# Altium PCB Maxi Gamer 3D - Rev 1.1_2023-03-26.pcbdoc
Units mil, origin at the board's own origin, x right, y up, seen from the top; angles counter-clockwise.
Board outline 46422.5 x 38348.5 mil, 2 copper layers (Top Layer, Bottom Layer); 3 components, 0 nets, 347 pads, 156 vias.
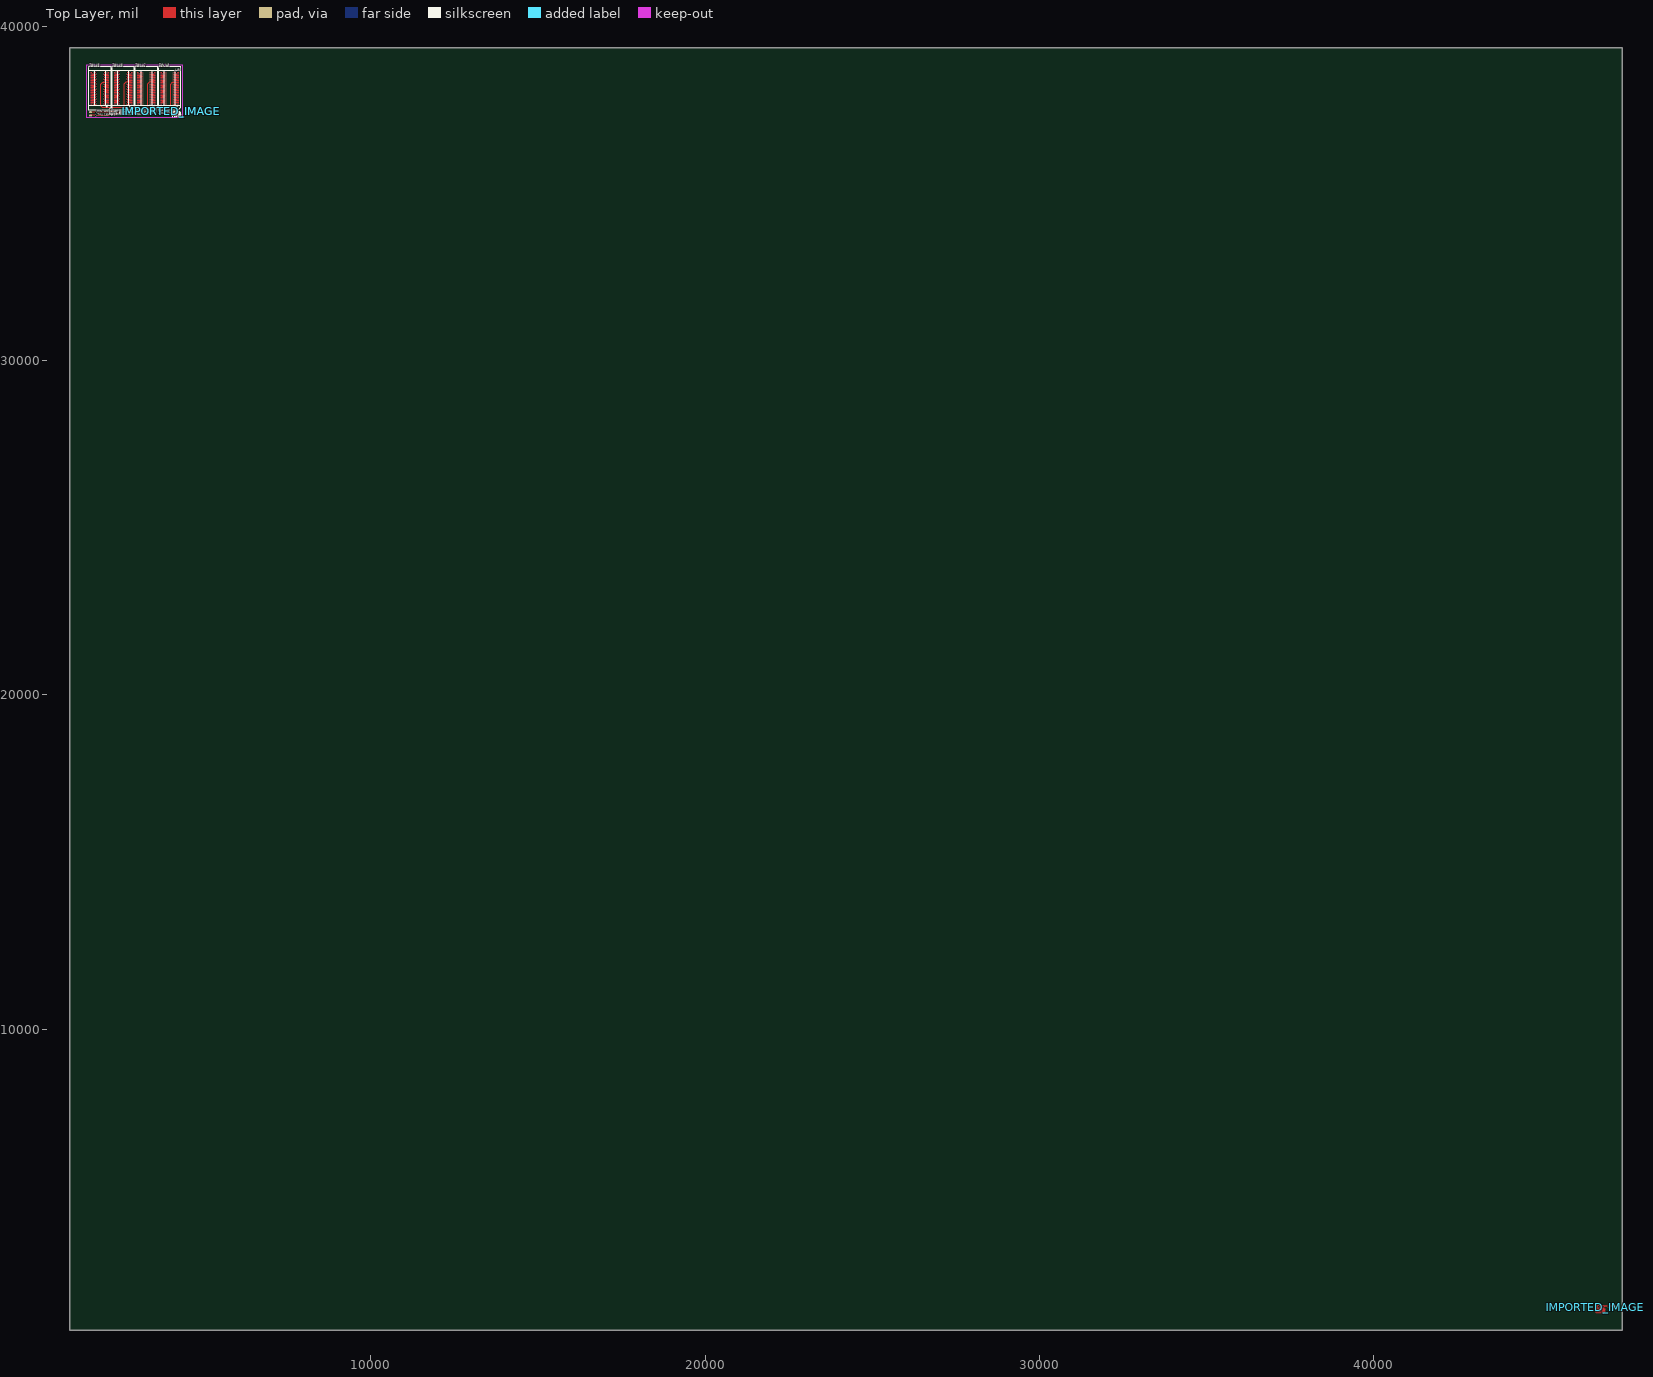
[diagram p0: Top Layer view]
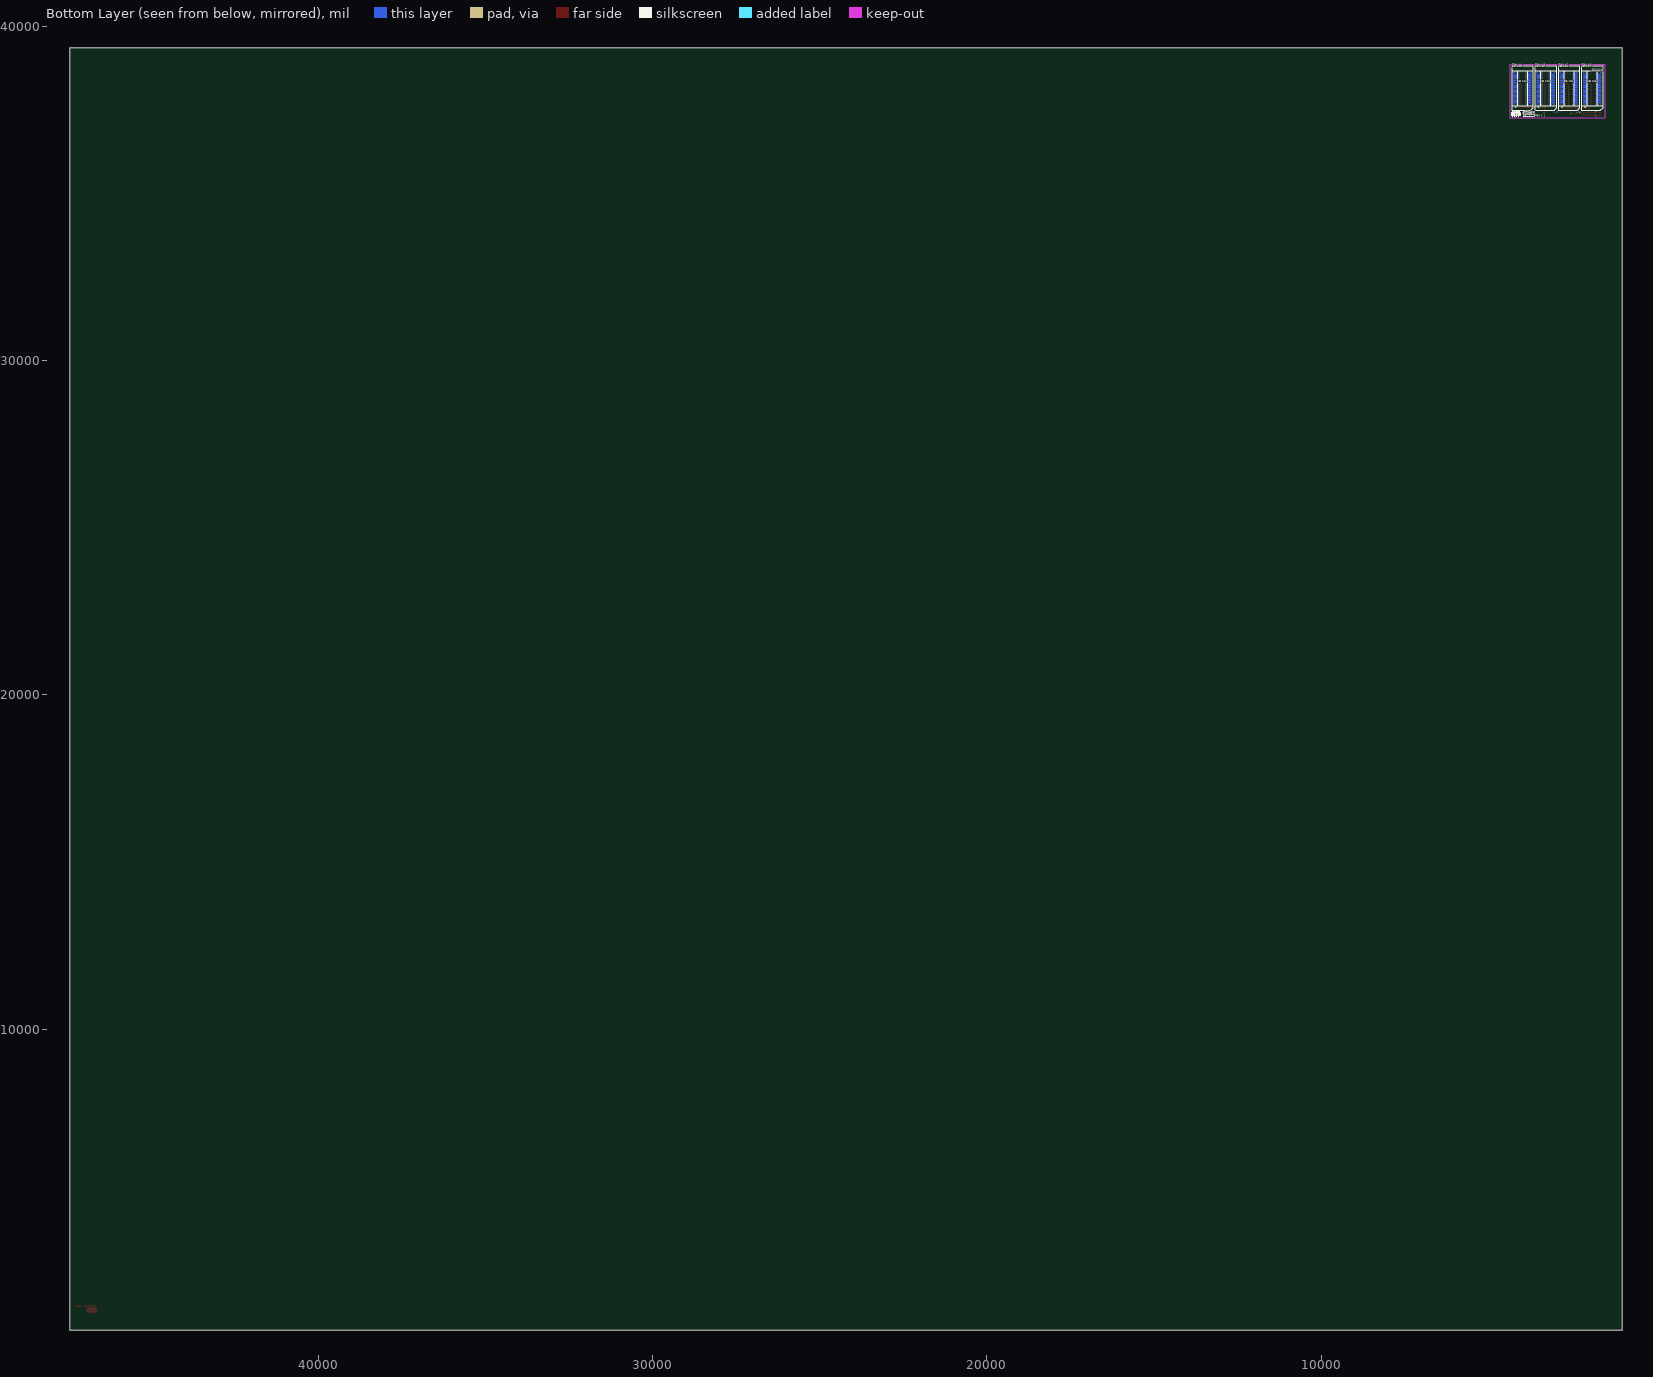
[diagram p1: Bottom Layer view, seen from below]

## Layer stack, top to bottom
Top Layer: signal copper (thickness not stored)
Dielectric: dielectric 12.6, FR-4, Dk 4.8
Bottom Layer: signal copper (thickness not stored)

## Board outline
47422.5,1000 1000,1000 1000,39348.5 47422.5,39348.5

## Components (designator, comment, footprint, x,y, rotation, side; value= is the part's Value field where it differs from the comment)
IMPORTED_IMAGE "IMPORTED_IMAGE" IMPORTED_IMAGE#1 4028.82,37460.16 r0 top
IMPORTED_IMAGE "IMPORTED_IMAGE" IMPORTED_IMAGE#2 46627.5,1677.01 r0 top
IMPORTED_IMAGE "IMPORTED_IMAGE" IMPORTED_IMAGE#1 4026.18,37460.16 r0 top

## Footprints (in the part's own frame and the unit in brackets; to place one, negate y for a bottom-side part, rotate by r counter-clockwise, add the part's x,y. Pads: shape width x height; smd on the part's side, far side on the other; paste and mask are expansions set on the pad)
IMPORTED_IMAGE#1 [mil]
  silkscreen extent 0,-177 295,0
IMPORTED_IMAGE#2 [mil]
  Top Layer region: 281 vertices and 16 holes, not listed, extent 0,-177.01 181.11,0
  Top Layer region: 366 vertices and 10 holes, not listed, extent 185.47,-176.57 295,-1.31

## Free pads (board coordinates)
  round 0 smd: 1(2109.36,37668.5) 1(2805.01,37668.5) 1(3500.01,37668.5) 1(4195.01,37668.5) 2(2109.36,37718.5) 2(2805.01,37718.5) 2(3500.01,37718.5) 2(4195.01,37718.5) 3(2109.36,37768.5) 3(2805.01,37768.5) 3(3500.01,37768.5) 3(4195.01,37768.5) 4(2109.36,37818.5) 4(2805.01,37818.5) 4(3500.01,37818.5) 4(4195.01,37818.5) 5(2109.36,37868.5) 5(2805.01,37868.5) 5(3500.01,37868.5) 5(4195.01,37868.5) 6(2109.36,37918.5) 6(2805.01,37918.5) 6(3500.01,37918.5) 6(4195.01,37918.5) 7(2109.36,37968.5) 7(2805.01,37968.5) 7(3500.01,37968.5) 7(4195.01,37968.5) 8(2109.36,38018.5) 8(2805.01,38018.5) 8(3500.01,38018.5) 8(4195.01,38018.5) 9(2109.36,38068.5) 9(2805.01,38068.5) 9(3500.01,38068.5) 9(4195.01,38068.5) 10(2109.36,38118.5) 10(2805.01,38118.5) 10(3500.01,38118.5) 10(4195.01,38118.5) 11(2109.36,38168.5) 11(2805.01,38168.5) 11(3500.01,38168.5) 11(4195.01,38168.5) 12(2109.36,38218.5) 12(2805.01,38218.5) 12(3500.01,38218.5) 12(4195.01,38218.5) 13(2109.36,38268.5) 13(2805.01,38268.5) 13(3500.01,38268.5) 13(4195.01,38268.5) 14(2109.36,38318.5) 14(2805.01,38318.5) 14(3500.01,38318.5) 14(4195.01,38318.5) 15(2109.36,38368.5) 15(2805.01,38368.5) 15(3500.01,38368.5) 15(4195.01,38368.5) 16(2109.36,38418.5) 16(2805.01,38418.5) 16(3500.01,38418.5) 16(4195.01,38418.5) 17(2109.36,38468.5) 17(2805.01,38468.5) 17(3500.01,38468.5) 17(4195.01,38468.5) 18(2109.36,38518.5) 18(2805.01,38518.5) 18(3500.01,38518.5) 18(4195.01,38518.5) 19(2109.36,38568.5) 19(2805.01,38568.5) 19(3500.01,38568.5) 19(4195.01,38568.5) 20(2109.36,38618.5) 20(2805.01,38618.5) 20(3500.01,38618.5) 20(4195.01,38618.5) 21(1679.99,38618.5) 21(2375.64,38618.5) 21(2375.64,38618.5) 21(3070.64,38618.5) 21(3765.64,38618.5) 22(1679.99,38568.5) 22(2375.64,38568.5) 22(3070.64,38568.5) 22(3765.64,38568.5) 23(1679.99,38518.5) 23(2375.64,38518.5) 23(3070.64,38518.5) 23(3765.64,38518.5) 24(1679.99,38468.5) 24(2375.64,38468.5) 24(3070.64,38468.5) 24(3765.64,38468.5) 25(1679.99,38418.5) 25(2375.64,38418.5) 25(3070.64,38418.5) 25(3765.64,38418.5) 26(1679.99,38368.5) 26(2375.64,38368.5) 26(3070.64,38368.5) 26(3765.64,38368.5) 27(1679.99,38318.5) 27(2375.64,38318.5) 27(3070.64,38318.5) 27(3765.64,38318.5) 28(1679.99,38268.5) 28(2375.64,38268.5) 28(3070.64,38268.5) 28(3765.64,38268.5) 29(1679.99,38218.5) 29(2375.64,38218.5) 29(3070.64,38218.5) 29(3765.64,38218.5) 30(1679.99,38168.5) 30(2375.64,38168.5) 30(3070.64,38168.5) 30(3765.64,38168.5) 31(1679.99,38118.5) 31(2375.64,38118.5) 31(3070.64,38118.5) 31(3765.64,38118.5) 32(1679.99,38068.5) 32(2375.64,38068.5) 32(3070.64,38068.5) 32(3765.64,38068.5) 33(1679.99,38018.5) 33(2375.64,38018.5) 33(3070.64,38018.5) 33(3765.64,38018.5) 34(1679.99,37968.5) 34(2375.64,37968.5) 34(3070.64,37968.5) 34(3765.64,37968.5) 35(1679.99,37918.5) 35(2375.64,37918.5) 35(3070.64,37918.5) 35(3765.64,37918.5) 36(1679.99,37868.5) 36(2375.64,37868.5) 36(3070.64,37868.5) 36(3765.64,37868.5) 37(1679.99,37818.5) 37(2375.64,37818.5) 37(3070.64,37818.5) 37(3765.64,37818.5) 38(1679.99,37768.5) 38(2375.64,37768.5) 38(3070.64,37768.5) 38(3765.64,37768.5) 39(1679.99,37718.5) 39(2375.64,37718.5) 39(3070.64,37718.5) 39(3765.64,37718.5) 40(1679.99,37668.5) 40(2375.64,37668.5) 40(3070.64,37668.5) 40(3765.64,37668.5)
  round 0 smd far side: 1(2109.36,37668.5) 1(2805.01,37668.5) 1(3500.01,37668.5) 1(4195.01,37668.5) 2(2109.36,37718.5) 2(2805.01,37718.5) 2(3500.01,37718.5) 2(4195.01,37718.5) 3(2109.36,37768.5) 3(2805.01,37768.5) 3(3500.01,37768.5) 3(4195.01,37768.5) 4(2109.36,37818.5) 4(2805.01,37818.5) 4(3500.01,37818.5) 4(4195.01,37818.5) 5(2109.36,37868.5) 5(2805.01,37868.5) 5(3500.01,37868.5) 5(4195.01,37868.5) 6(2109.36,37918.5) 6(2805.01,37918.5) 6(3500.01,37918.5) 6(4195.01,37918.5) 7(2109.36,37968.5) 7(2805.01,37968.5) 7(3500.01,37968.5) 7(4195.01,37968.5) 8(2109.36,38018.5) 8(2805.01,38018.5) 8(3500.01,38018.5) 8(4195.01,38018.5) 9(2109.36,38068.5) 9(2805.01,38068.5) 9(3500.01,38068.5) 9(4195.01,38068.5) 10(2109.36,38118.5) 10(2805.01,38118.5) 10(3500.01,38118.5) 10(4195.01,38118.5) 11(2109.36,38168.5) 11(2805.01,38168.5) 11(3500.01,38168.5) 11(4195.01,38168.5) 12(2109.36,38218.5) 12(2805.01,38218.5) 12(3500.01,38218.5) 12(4195.01,38218.5) 13(2109.36,38268.5) 13(2805.01,38268.5) 13(3500.01,38268.5) 13(4195.01,38268.5) 14(2109.36,38318.5) 14(2805.01,38318.5) 14(3500.01,38318.5) 14(4195.01,38318.5) 15(2109.36,38368.5) 15(2805.01,38368.5) 15(3500.01,38368.5) 15(4195.01,38368.5) 16(2109.36,38418.5) 16(2805.01,38418.5) 16(3500.01,38418.5) 16(4195.01,38418.5) 17(2109.36,38468.5) 17(2805.01,38468.5) 17(3500.01,38468.5) 17(4195.01,38468.5) 18(2109.36,38518.5) 18(2805.01,38518.5) 18(3500.01,38518.5) 18(4195.01,38518.5) 19(2109.36,38568.5) 19(2805.01,38568.5) 19(3500.01,38568.5) 19(4195.01,38568.5) 20(2109.36,38618.5) 20(2805.01,38618.5) 20(3500.01,38618.5) 20(4195.01,38618.5) 21(1679.99,38618.5) 21(2375.64,38618.5) 21(3070.64,38618.5) 21(3765.64,38618.5) 22(1679.99,38568.5) 22(2375.64,38568.5) 22(3070.64,38568.5) 22(3765.64,38568.5) 23(1679.99,38518.5) 23(2375.64,38518.5) 23(3070.64,38518.5) 23(3765.64,38518.5) 24(1679.99,38468.5) 24(2375.64,38468.5) 24(3070.64,38468.5) 24(3765.64,38468.5) 25(1679.99,38418.5) 25(2375.64,38418.5) 25(3070.64,38418.5) 25(3765.64,38418.5) 26(1679.99,38368.5) 26(2375.64,38368.5) 26(3070.64,38368.5) 26(3765.64,38368.5) 27(1679.99,38318.5) 27(2375.64,38318.5) 27(3070.64,38318.5) 27(3765.64,38318.5) 28(1679.99,38268.5) 28(2375.64,38268.5) 28(3070.64,38268.5) 28(3765.64,38268.5) 29(1679.99,38218.5) 29(2375.64,38218.5) 29(3070.64,38218.5) 29(3765.64,38218.5) 30(1679.99,38168.5) 30(2375.64,38168.5) 30(3070.64,38168.5) 30(3765.64,38168.5) 31(1679.99,38118.5) 31(2375.64,38118.5) 31(3070.64,38118.5) 31(3765.64,38118.5) 32(1679.99,38068.5) 32(2375.64,38068.5) 32(3070.64,38068.5) 32(3765.64,38068.5) 33(1679.99,38018.5) 33(2375.64,38018.5) 33(3070.64,38018.5) 33(3765.64,38018.5) 34(1679.99,37968.5) 34(2375.64,37968.5) 34(3070.64,37968.5) 34(3765.64,37968.5) 35(1679.99,37918.5) 35(2375.64,37918.5) 35(3070.64,37918.5) 35(3765.64,37918.5) 36(1679.99,37868.5) 36(2375.64,37868.5) 36(3070.64,37868.5) 36(3765.64,37868.5) 37(1679.99,37818.5) 37(2375.64,37818.5) 37(3070.64,37818.5) 37(3765.64,37818.5) 38(1679.99,37768.5) 38(2375.64,37768.5) 38(3070.64,37768.5) 38(3765.64,37768.5) 39(1679.99,37718.5) 39(2375.64,37718.5) 39(3070.64,37718.5) 39(3765.64,37718.5) 40(1679.99,37668.5) 40(2375.64,37668.5) 40(3070.64,37668.5) 40(3765.64,37668.5)
  oval 98.42x59.05 smd: ""(1615,37328.5) ""(1615,37428.5)
  round 39.37 hole 24 slot 24.2 at 90 deg: ""(1685,37668.5) ""(1685,38618.5) ""(2105,37668.5) ""(2105,38618.5) ""(2380,37668.5) ""(2380,38618.5) ""(2530,37398.5) ""(2800,37668.5) ""(2800,38618.5) ""(2875,37398.5) ""(2995,37398.5) ""(3075,37668.5) ""(3075,38618.5) ""(3340,37398.5) ""(3495,37668.5) ""(3495,38618.5) ""(3770,37668.5) ""(3770,38618.5) ""(4190,37668.5) ""(4190,38618.5)
  round 59.05 hole 35.43 slot 37.4 at 0 deg: ""(1775,37328.5) ""(1775,37428.5)
  round 59.05 hole 35.43 slot 37.4 at 90 deg: ""(2240,37398.5) ""(2340,37398.5)

## Via types
v1: diameter 24, hole 12, Top Layer to Bottom Layer, tented both sides, 156 vias

## Nets (pads, with @x,y where several pads share a name; then routed paths per layer and width w, separated by ;. In a path a pad name is that pad's centre, name@x,y a point inside that pad or via, vN(x,y) a via of type N, cw(c..) or ccw(c..) an arc to the next point about the centre after c; other vN are vias at no path point)
copper on no net: | length 42119.1
  Top Layer w10: 1615,37328.5 1775,37328.5 2170,37328.5 2240,37398.5 ; 1615,37428.5 1775,37428.5 2160,37428.5 2190,37458.5 2280,37458.5 2340,37398.5 2530,37398.5 ; 1680,37668.5 v1(1790,37668.5) ; 1680,37718.5 v1(1790,37718.5) ; 1680,37768.5 v1(1790,37768.5) ; 1680,37818.5 v1(1790,37818.5) ; 1680,37868.5 v1(1790,37868.5) ; 1680,37918.5 v1(1790,37918.5) ; 1680,37968.5 v1(1790,37968.5) ; 1680,38018.5 v1(1790,38018.5) ; 1680,38068.5 v1(1790,38068.5) ; 1680,38118.5 v1(1790,38118.5) ; 1680,38168.5 v1(1790,38168.5) ; 1680,38218.5 v1(1790,38218.5) ; 1680,38268.5 v1(1790,38268.5) ; 1680,38318.5 v1(1790,38318.5) ; 1680,38368.5 v1(1790,38368.5) ; 1680,38418.5 v1(1790,38418.5) ; 1680,38468.5 v1(1790,38468.5) ; 1680,38518.5 v1(1790,38518.5) ; 1680,38568.5 v1(1790,38568.5) ; 1680,38618.5 v1(1790,38618.5) ; v1(2000,37668.5) 2109.36,37668.5 ; v1(2000,37718.5) 2109.36,37718.5 ; v1(2000,37768.5) 2109.36,37768.5 ; v1(2000,37818.5) 2109.36,37818.5 ; v1(2000,37868.5) 2109.36,37868.5 ; v1(2000,37918.5) 2109.36,37918.5 ; v1(2000,37968.5) 2109.36,37968.5 ; v1(2000,38018.5) 2109.36,38018.5 ; v1(2000,38068.5) 2109.36,38068.5 ; v1(2000,38118.5) 2109.36,38118.5 ; v1(2000,38168.5) 2109.36,38168.5 ; v1(2000,38218.5) 2109.36,38218.5 ; v1(2000,38268.5) 2109.36,38268.5 ; v1(2000,38368.5) 2109.36,38368.5 ; v1(2000,38418.5) 2109.36,38418.5 ; v1(2000,38468.5) 2109.36,38468.5 ; v1(2000,38518.5) 2109.36,38518.5 ; v1(2000,38568.5) 2109.36,38568.5 ; v1(2000,38618.5) 2109.36,38618.5 ; 2109.36,38318.5 1975,38318.5 1925,38268.5 1925,37613.5 1975,37563.5 2615,37563.5 ; 2375.64,37668.5 v1(2485,37668.5) ; 2375.64,37718.5 v1(2485,37718.5) ; 2375.64,37768.5 v1(2485,37768.5) ; 2375.64,37818.5 v1(2485,37818.5) ; 2375.64,37868.5 v1(2485,37868.5) ; 2375.64,37918.5 v1(2485,37918.5) ; 2375.64,37968.5 v1(2485,37968.5) ; 2375.64,38018.5 v1(2485,38018.5) ; 2375.64,38068.5 v1(2485,38068.5) ; 2375.64,38118.5 v1(2485,38118.5) ; 2375.64,38168.5 v1(2485,38168.5) ; 2375.64,38218.5 v1(2485,38218.5) ; 2375.64,38268.5 v1(2485,38268.5) ; 2375.64,38318.5 v1(2485,38318.5) ; 2375.64,38368.5 v1(2485,38368.5) ; 2375.64,38418.5 v1(2485,38418.5) ; 2375.64,38468.5 v1(2485,38468.5) ; 2375.64,38518.5 v1(2485,38518.5) ; 2375.64,38568.5 v1(2485,38568.5) ; 2375.64,38618.5 v1(2485,38618.5) ; v1(2695,37668.5) 2805,37668.5 ; v1(2695,37718.5) 2805,37718.5 ; v1(2695,37768.5) 2805,37768.5 ; v1(2695,37818.5) 2805,37818.5 ; v1(2695,37868.5) 2805,37868.5 ; v1(2695,37918.5) 2805,37918.5 ; v1(2695,37968.5) 2805,37968.5 ; v1(2695,38018.5) 2805,38018.5 ; v1(2695,38068.5) 2805,38068.5 ; v1(2695,38118.5) 2805,38118.5 ; v1(2695,38168.5) 2805,38168.5 ; v1(2695,38218.5) 2805,38218.5 ; v1(2695,38268.5) 2805,38268.5 ; v1(2695,38368.5) 2805,38368.5 ; v1(2695,38418.5) 2805,38418.5 ; v1(2695,38468.5) 2805,38468.5 ; v1(2695,38518.5) 2805,38518.5 ; v1(2695,38568.5) 2805,38568.5 ; v1(2695,38618.5) 2805,38618.5 ; 2805,38318.5 2665,38318.5 2615,38268.5 2615,37563.5 ; 2875,37398.5 2710,37563.5 2615,37563.5 ; 3070.64,37668.5 v1(3180,37668.5) ; 3070.64,37718.5 v1(3180,37718.5) ; 3070.64,37768.5 v1(3180,37768.5) ; 3070.64,37818.5 v1(3180,37818.5) ; 3070.64,37868.5 v1(3180,37868.5) ; 3070.64,37918.5 v1(3180,37918.5) ; 3070.64,37968.5 v1(3180,37968.5) ; 3070.64,38018.5 v1(3180,38018.5) ; 3070.64,38068.5 v1(3180,38068.5) ; 3070.64,38118.5 v1(3180,38118.5) ; 3070.64,38168.5 v1(3180,38168.5) ; 3070.64,38218.5 v1(3180,38218.5) ; 3070.64,38268.5 v1(3180,38268.5) ; 3070.64,38318.5 v1(3180,38318.5) ; 3070.64,38368.5 v1(3180,38368.5) ; 3070.64,38418.5 v1(3180,38418.5) ; 3070.64,38468.5 v1(3180,38468.5) ; 3070.64,38518.5 v1(3180,38518.5) ; 3070.64,38568.5 v1(3180,38568.5) ; 3070.64,38618.5 v1(3180,38618.5) ; 3340,37398.5 3310,37428.5 3310,37563.5 ; v1(3390,37668.5) 3500,37668.5 ; v1(3390,37718.5) 3500,37718.5 ; v1(3390,37768.5) 3500,37768.5 ; v1(3390,37818.5) 3500,37818.5 ; v1(3390,37868.5) 3500,37868.5 ; v1(3390,37918.5) 3500,37918.5 ; v1(3390,37968.5) 3500,37968.5 ; v1(3390,38018.5) 3500,38018.5 ; v1(3390,38068.5) 3500,38068.5 ; v1(3390,38118.5) 3500,38118.5 ; v1(3390,38168.5) 3500,38168.5 ; v1(3390,38218.5) 3500,38218.5 ; v1(3390,38268.5) 3500,38268.5 ; v1(3390,38368.5) 3500,38368.5 ; v1(3390,38418.5) 3500,38418.5 ; v1(3390,38468.5) 3500,38468.5 ; v1(3390,38518.5) 3500,38518.5 ; v1(3390,38568.5) 3500,38568.5 ; v1(3390,38618.5) 3500,38618.5 ; 3500,38318.5 3365,38318.5 3310,38263.5 3310,37563.5 ; 3765.64,37668.5 v1(3875,37668.5) ; 3765.64,37718.5 v1(3875,37718.5) ; 3765.64,37768.5 v1(3875,37768.5) ; 3765.64,37818.5 v1(3875,37818.5) ; 3765.64,37868.5 v1(3875,37868.5) ; 3765.64,37918.5 v1(3875,37918.5) ; 3765.64,37968.5 v1(3875,37968.5) ; 3765.64,38018.5 v1(3875,38018.5) ; 3765.64,38068.5 v1(3875,38068.5) ; 3765.64,38118.5 v1(3875,38118.5) ; 3765.64,38168.5 v1(3875,38168.5) ; 3765.64,38218.5 v1(3875,38218.5) ; 3765.64,38268.5 v1(3875,38268.5) ; 3765.64,38318.5 v1(3875,38318.5) ; 3765.64,38368.5 v1(3875,38368.5) ; 3765.64,38418.5 v1(3875,38418.5) ; 3765.64,38468.5 v1(3875,38468.5) ; 3765.64,38518.5 v1(3875,38518.5) ; 3765.64,38568.5 v1(3875,38568.5) ; 3765.64,38618.5 v1(3875,38618.5) ; v1(4085,37668.5) 4195,37668.5 ; v1(4085,37718.5) 4195,37718.5 ; v1(4085,37768.5) 4195,37768.5 ; v1(4085,37818.5) 4195,37818.5 ; v1(4085,37868.5) 4195,37868.5 ; v1(4085,37918.5) 4195,37918.5 ; v1(4085,37968.5) 4195,37968.5 ; v1(4085,38018.5) 4195,38018.5 ; v1(4085,38068.5) 4195,38068.5 ; v1(4085,38118.5) 4195,38118.5 ; v1(4085,38168.5) 4195,38168.5 ; v1(4085,38218.5) 4195,38218.5 ; v1(4085,38268.5) 4195,38268.5 ; v1(4085,38368.5) 4195,38368.5 ; v1(4085,38418.5) 4195,38418.5 ; v1(4085,38468.5) 4195,38468.5 ; v1(4085,38518.5) 4195,38518.5 ; v1(4085,38568.5) 4195,38568.5 ; v1(4085,38618.5) 4195,38618.5 ; 4195,38318.5 4060,38318.5 4010,38263.5 4010,37613.5 3960,37563.5 3310,37563.5
  Bottom Layer w10: 1680,37668.5 v1(1790,37668.5) ; 1680,37718.5 v1(1790,37718.5) ; 1680,37768.5 v1(1790,37768.5) ; 1680,37818.5 v1(1790,37818.5) ; 1680,37868.5 v1(1790,37868.5) ; 1680,37918.5 v1(1790,37918.5) ; 1680,37968.5 v1(1790,37968.5) ; 1680,38018.5 v1(1790,38018.5) ; 1680,38068.5 v1(1790,38068.5) ; 1680,38118.5 v1(1790,38118.5) ; 1680,38168.5 v1(1790,38168.5) ; 1680,38218.5 v1(1790,38218.5) ; 1680,38268.5 v1(1790,38268.5) ; 1680,38318.5 v1(1790,38318.5) ; 1680,38368.5 v1(1790,38368.5) ; 1680,38418.5 v1(1790,38418.5) ; 1680,38468.5 v1(1790,38468.5) ; 1680,38518.5 v1(1790,38518.5) ; 1680,38568.5 v1(1790,38568.5) ; 1680,38618.5 v1(1790,38618.5) ; v1(2000,37668.5) 2109.36,37668.5 ; v1(2000,37718.5) 2109.36,37718.5 ; v1(2000,37768.5) 2109.36,37768.5 ; v1(2000,37818.5) 2109.36,37818.5 ; v1(2000,37868.5) 2109.36,37868.5 ; v1(2000,37918.5) 2109.36,37918.5 ; v1(2000,37968.5) 2109.36,37968.5 ; v1(2000,38018.5) 2109.36,38018.5 ; v1(2000,38068.5) 2109.36,38068.5 ; v1(2000,38118.5) 2109.36,38118.5 ; v1(2000,38168.5) 2109.36,38168.5 ; v1(2000,38218.5) 2109.36,38218.5 ; v1(2000,38268.5) 2109.36,38268.5 ; v1(2000,38368.5) 2109.36,38368.5 ; v1(2000,38418.5) 2109.36,38418.5 ; v1(2000,38468.5) 2109.36,38468.5 ; v1(2000,38518.5) 2109.36,38518.5 ; v1(2000,38568.5) 2109.36,38568.5 ; v1(2000,38618.5) 2109.36,38618.5 ; 2240,37398.5 2305,37463.5 2930,37463.5 2995,37398.5 ; 2375.64,37668.5 v1(2485,37668.5) ; 2375.64,37718.5 v1(2485,37718.5) ; 2375.64,37768.5 v1(2485,37768.5) ; 2375.64,37818.5 v1(2485,37818.5) ; 2375.64,37868.5 v1(2485,37868.5) ; 2375.64,37918.5 v1(2485,37918.5) ; 2375.64,37968.5 v1(2485,37968.5) ; 2375.64,38018.5 v1(2485,38018.5) ; 2375.64,38068.5 v1(2485,38068.5) ; 2375.64,38118.5 v1(2485,38118.5) ; 2375.64,38168.5 v1(2485,38168.5) ; 2375.64,38218.5 v1(2485,38218.5) ; 2375.64,38268.5 v1(2485,38268.5) ; 2375.64,38318.5 v1(2485,38318.5) ; 2375.64,38368.5 v1(2485,38368.5) ; 2375.64,38418.5 v1(2485,38418.5) ; 2375.64,38468.5 v1(2485,38468.5) ; 2375.64,38518.5 v1(2485,38518.5) ; 2375.64,38568.5 v1(2485,38568.5) ; 2375.64,38618.5 v1(2485,38618.5) ; v1(2695,37668.5) 2805,37668.5 ; v1(2695,37718.5) 2805,37718.5 ; v1(2695,37768.5) 2805,37768.5 ; v1(2695,37818.5) 2805,37818.5 ; v1(2695,37868.5) 2805,37868.5 ; v1(2695,37918.5) 2805,37918.5 ; v1(2695,37968.5) 2805,37968.5 ; v1(2695,38018.5) 2805,38018.5 ; v1(2695,38068.5) 2805,38068.5 ; v1(2695,38118.5) 2805,38118.5 ; v1(2695,38168.5) 2805,38168.5 ; v1(2695,38218.5) 2805,38218.5 ; v1(2695,38268.5) 2805,38268.5 ; v1(2695,38368.5) 2805,38368.5 ; v1(2695,38418.5) 2805,38418.5 ; v1(2695,38468.5) 2805,38468.5 ; v1(2695,38518.5) 2805,38518.5 ; v1(2695,38568.5) 2805,38568.5 ; v1(2695,38618.5) 2805,38618.5 ; 3070.64,37668.5 v1(3180,37668.5) ; 3070.64,37718.5 v1(3180,37718.5) ; 3070.64,37768.5 v1(3180,37768.5) ; 3070.64,37818.5 v1(3180,37818.5) ; 3070.64,37868.5 v1(3180,37868.5) ; 3070.64,37918.5 v1(3180,37918.5) ; 3070.64,37968.5 v1(3180,37968.5) ; 3070.64,38018.5 v1(3180,38018.5) ; 3070.64,38068.5 v1(3180,38068.5) ; 3070.64,38118.5 v1(3180,38118.5) ; 3070.64,38168.5 v1(3180,38168.5) ; 3070.64,38218.5 v1(3180,38218.5) ; 3070.64,38268.5 v1(3180,38268.5) ; 3070.64,38318.5 v1(3180,38318.5) ; 3070.64,38368.5 v1(3180,38368.5) ; 3070.64,38418.5 v1(3180,38418.5) ; 3070.64,38468.5 v1(3180,38468.5) ; 3070.64,38518.5 v1(3180,38518.5) ; 3070.64,38568.5 v1(3180,38568.5) ; 3070.64,38618.5 v1(3180,38618.5) ; v1(3390,37668.5) 3500,37668.5 ; v1(3390,37718.5) 3500,37718.5 ; v1(3390,37768.5) 3500,37768.5 ; v1(3390,37818.5) 3500,37818.5 ; v1(3390,37868.5) 3500,37868.5 ; v1(3390,37918.5) 3500,37918.5 ; v1(3390,37968.5) 3500,37968.5 ; v1(3390,38018.5) 3500,38018.5 ; v1(3390,38068.5) 3500,38068.5 ; v1(3390,38118.5) 3500,38118.5 ; v1(3390,38168.5) 3500,38168.5 ; v1(3390,38218.5) 3500,38218.5 ; v1(3390,38268.5) 3500,38268.5 ; v1(3390,38368.5) 3500,38368.5 ; v1(3390,38418.5) 3500,38418.5 ; v1(3390,38468.5) 3500,38468.5 ; v1(3390,38518.5) 3500,38518.5 ; v1(3390,38568.5) 3500,38568.5 ; v1(3390,38618.5) 3500,38618.5 ; 3765.64,37668.5 v1(3875,37668.5) ; 3765.64,37718.5 v1(3875,37718.5) ; 3765.64,37768.5 v1(3875,37768.5) ; 3765.64,37818.5 v1(3875,37818.5) ; 3765.64,37868.5 v1(3875,37868.5) ; 3765.64,37918.5 v1(3875,37918.5) ; 3765.64,37968.5 v1(3875,37968.5) ; 3765.64,38018.5 v1(3875,38018.5) ; 3765.64,38068.5 v1(3875,38068.5) ; 3765.64,38118.5 v1(3875,38118.5) ; 3765.64,38168.5 v1(3875,38168.5) ; 3765.64,38218.5 v1(3875,38218.5) ; 3765.64,38268.5 v1(3875,38268.5) ; 3765.64,38318.5 v1(3875,38318.5) ; 3765.64,38368.5 v1(3875,38368.5) ; 3765.64,38418.5 v1(3875,38418.5) ; 3765.64,38468.5 v1(3875,38468.5) ; 3765.64,38518.5 v1(3875,38518.5) ; 3765.64,38568.5 v1(3875,38568.5) ; 3765.64,38618.5 v1(3875,38618.5) ; v1(4085,37668.5) 4195,37668.5 ; v1(4085,37718.5) 4195,37718.5 ; v1(4085,37768.5) 4195,37768.5 ; v1(4085,37818.5) 4195,37818.5 ; v1(4085,37868.5) 4195,37868.5 ; v1(4085,37918.5) 4195,37918.5 ; v1(4085,37968.5) 4195,37968.5 ; v1(4085,38018.5) 4195,38018.5 ; v1(4085,38068.5) 4195,38068.5 ; v1(4085,38118.5) 4195,38118.5 ; v1(4085,38168.5) 4195,38168.5 ; v1(4085,38218.5) 4195,38218.5 ; v1(4085,38268.5) 4195,38268.5 ; v1(4085,38368.5) 4195,38368.5 ; v1(4085,38418.5) 4195,38418.5 ; v1(4085,38468.5) 4195,38468.5 ; v1(4085,38518.5) 4195,38518.5 ; v1(4085,38568.5) 4195,38568.5 ; v1(4085,38618.5) 4195,38618.5

## Other copper
Top Layer:
  region: 2054.68,38308.5 2054.68,38328.5 2164.05,38328.5 2164.05,38308.5
  region: 2750.32,38308.5 2750.32,38328.5 2859.69,38328.5 2859.69,38308.5
  region: 3445.32,38308.5 3445.32,38328.5 3554.69,38328.5 3554.69,38308.5
  region: 4140.32,38308.5 4140.32,38328.5 4249.69,38328.5 4249.69,38308.5
  region: 1625.31,38608.5 1625.31,38628.5 1734.68,38628.5 1734.68,38608.5
  region: 1625.31,38558.5 1625.31,38578.5 1734.68,38578.5 1734.68,38558.5
  region: 1625.31,38508.5 1625.31,38528.5 1734.68,38528.5 1734.68,38508.5
  region: 1625.31,38458.5 1625.31,38478.5 1734.68,38478.5 1734.68,38458.5
  region: 1625.31,38408.5 1625.31,38428.5 1734.68,38428.5 1734.68,38408.5
  region: 1625.31,38358.5 1625.31,38378.5 1734.68,38378.5 1734.68,38358.5
  region: 1625.31,38308.5 1625.31,38328.5 1734.68,38328.5 1734.68,38308.5
  region: 1625.31,38258.5 1625.31,38278.5 1734.68,38278.5 1734.68,38258.5
  region: 1625.31,38208.5 1625.31,38228.5 1734.68,38228.5 1734.68,38208.5
  region: 1625.31,38158.5 1625.31,38178.5 1734.68,38178.5 1734.68,38158.5
  region: 1625.31,38108.5 1625.31,38128.5 1734.68,38128.5 1734.68,38108.5
  region: 1625.31,38058.5 1625.31,38078.5 1734.68,38078.5 1734.68,38058.5
  region: 1625.31,38008.5 1625.31,38028.5 1734.68,38028.5 1734.68,38008.5
  region: 1625.31,37958.5 1625.31,37978.5 1734.68,37978.5 1734.68,37958.5
  region: 1625.31,37908.5 1625.31,37928.5 1734.68,37928.5 1734.68,37908.5
  region: 1625.31,37858.5 1625.31,37878.5 1734.68,37878.5 1734.68,37858.5
  region: 1625.31,37808.5 1625.31,37828.5 1734.68,37828.5 1734.68,37808.5
  region: 1625.31,37758.5 1625.31,37778.5 1734.68,37778.5 1734.68,37758.5
  region: 1625.31,37708.5 1625.31,37728.5 1734.68,37728.5 1734.68,37708.5
  region: 1625.31,37658.5 1625.31,37678.5 1734.68,37678.5 1734.68,37658.5
  region: 2054.68,38608.5 2054.68,38628.5 2164.05,38628.5 2164.05,38608.5
  region: 2054.68,38558.5 2054.68,38578.5 2164.05,38578.5 2164.05,38558.5
  region: 2054.68,38508.5 2054.68,38528.5 2164.05,38528.5 2164.05,38508.5
  region: 2054.68,38458.5 2054.68,38478.5 2164.05,38478.5 2164.05,38458.5
  region: 2054.68,38408.5 2054.68,38428.5 2164.05,38428.5 2164.05,38408.5
  region: 2054.68,38358.5 2054.68,38378.5 2164.05,38378.5 2164.05,38358.5
  region: 2054.68,38258.5 2054.68,38278.5 2164.05,38278.5 2164.05,38258.5
  region: 2054.68,38208.5 2054.68,38228.5 2164.05,38228.5 2164.05,38208.5
  region: 2054.68,38158.5 2054.68,38178.5 2164.05,38178.5 2164.05,38158.5
  region: 2054.68,38108.5 2054.68,38128.5 2164.05,38128.5 2164.05,38108.5
  region: 2054.68,38058.5 2054.68,38078.5 2164.05,38078.5 2164.05,38058.5
  region: 2054.68,38008.5 2054.68,38028.5 2164.05,38028.5 2164.05,38008.5
  region: 2054.68,37958.5 2054.68,37978.5 2164.05,37978.5 2164.05,37958.5
  region: 2054.68,37908.5 2054.68,37928.5 2164.05,37928.5 2164.05,37908.5
  region: 2054.68,37858.5 2054.68,37878.5 2164.05,37878.5 2164.05,37858.5
  region: 2054.68,37808.5 2054.68,37828.5 2164.05,37828.5 2164.05,37808.5
  region: 2054.68,37758.5 2054.68,37778.5 2164.05,37778.5 2164.05,37758.5
  region: 2054.68,37708.5 2054.68,37728.5 2164.05,37728.5 2164.05,37708.5
  region: 2054.68,37658.5 2054.68,37678.5 2164.05,37678.5 2164.05,37658.5
  region: 2320.95,38608.5 2320.95,38628.5 2430.32,38628.5 2430.32,38608.5
  region: 2320.95,38608.5 2320.95,38628.5 2430.32,38628.5 2430.32,38608.5
  region: 2320.95,38558.5 2320.95,38578.5 2430.32,38578.5 2430.32,38558.5
  region: 2320.95,38508.5 2320.95,38528.5 2430.32,38528.5 2430.32,38508.5
  region: 2320.95,38458.5 2320.95,38478.5 2430.32,38478.5 2430.32,38458.5
  region: 2320.95,37658.5 2320.95,37678.5 2430.32,37678.5 2430.32,37658.5
  region: 2320.95,37708.5 2320.95,37728.5 2430.32,37728.5 2430.32,37708.5
  region: 2320.95,37758.5 2320.95,37778.5 2430.32,37778.5 2430.32,37758.5
  region: 2320.95,37808.5 2320.95,37828.5 2430.32,37828.5 2430.32,37808.5
  region: 2320.95,37858.5 2320.95,37878.5 2430.32,37878.5 2430.32,37858.5
  region: 2320.95,37908.5 2320.95,37928.5 2430.32,37928.5 2430.32,37908.5
  region: 2320.95,37958.5 2320.95,37978.5 2430.32,37978.5 2430.32,37958.5
  region: 2320.95,38008.5 2320.95,38028.5 2430.32,38028.5 2430.32,38008.5
  region: 2320.95,38058.5 2320.95,38078.5 2430.32,38078.5 2430.32,38058.5
  region: 2320.95,38108.5 2320.95,38128.5 2430.32,38128.5 2430.32,38108.5
  region: 2320.95,38158.5 2320.95,38178.5 2430.32,38178.5 2430.32,38158.5
  region: 2320.95,38208.5 2320.95,38228.5 2430.32,38228.5 2430.32,38208.5
  region: 2320.95,38258.5 2320.95,38278.5 2430.32,38278.5 2430.32,38258.5
  region: 2320.95,38308.5 2320.95,38328.5 2430.32,38328.5 2430.32,38308.5
  region: 2320.95,38358.5 2320.95,38378.5 2430.32,38378.5 2430.32,38358.5
  region: 2320.95,38408.5 2320.95,38428.5 2430.32,38428.5 2430.32,38408.5
  region: 2750.32,38608.5 2750.32,38628.5 2859.69,38628.5 2859.69,38608.5
  region: 2750.32,38558.5 2750.32,38578.5 2859.69,38578.5 2859.69,38558.5
  region: 2750.32,38508.5 2750.32,38528.5 2859.69,38528.5 2859.69,38508.5
  region: 2750.32,38458.5 2750.32,38478.5 2859.69,38478.5 2859.69,38458.5
  region: 2750.32,38408.5 2750.32,38428.5 2859.69,38428.5 2859.69,38408.5
  region: 2750.32,38358.5 2750.32,38378.5 2859.69,38378.5 2859.69,38358.5
  region: 2750.32,38258.5 2750.32,38278.5 2859.69,38278.5 2859.69,38258.5
  region: 2750.32,38208.5 2750.32,38228.5 2859.69,38228.5 2859.69,38208.5
  region: 2750.32,38158.5 2750.32,38178.5 2859.69,38178.5 2859.69,38158.5
  region: 2750.32,38108.5 2750.32,38128.5 2859.69,38128.5 2859.69,38108.5
  region: 2750.32,38058.5 2750.32,38078.5 2859.69,38078.5 2859.69,38058.5
  region: 2750.32,38008.5 2750.32,38028.5 2859.69,38028.5 2859.69,38008.5
  region: 2750.32,37958.5 2750.32,37978.5 2859.69,37978.5 2859.69,37958.5
  region: 2750.32,37908.5 2750.32,37928.5 2859.69,37928.5 2859.69,37908.5
  region: 2750.32,37858.5 2750.32,37878.5 2859.69,37878.5 2859.69,37858.5
  region: 2750.32,37808.5 2750.32,37828.5 2859.69,37828.5 2859.69,37808.5
  region: 2750.32,37758.5 2750.32,37778.5 2859.69,37778.5 2859.69,37758.5
  region: 2750.32,37708.5 2750.32,37728.5 2859.69,37728.5 2859.69,37708.5
  region: 2750.32,37658.5 2750.32,37678.5 2859.69,37678.5 2859.69,37658.5
  region: 3015.95,38608.5 3015.95,38628.5 3125.32,38628.5 3125.32,38608.5
  region: 3015.95,38558.5 3015.95,38578.5 3125.32,38578.5 3125.32,38558.5
  region: 3015.95,38508.5 3015.95,38528.5 3125.32,38528.5 3125.32,38508.5
  region: 3015.95,38458.5 3015.95,38478.5 3125.32,38478.5 3125.32,38458.5
  region: 3015.95,38408.5 3015.95,38428.5 3125.32,38428.5 3125.32,38408.5
  region: 3015.95,38358.5 3015.95,38378.5 3125.32,38378.5 3125.32,38358.5
  region: 3015.95,38308.5 3015.95,38328.5 3125.32,38328.5 3125.32,38308.5
  region: 3015.95,38258.5 3015.95,38278.5 3125.32,38278.5 3125.32,38258.5
  region: 3015.95,38208.5 3015.95,38228.5 3125.32,38228.5 3125.32,38208.5
  region: 3015.95,38158.5 3015.95,38178.5 3125.32,38178.5 3125.32,38158.5
  region: 3015.95,38108.5 3015.95,38128.5 3125.32,38128.5 3125.32,38108.5
  region: 3015.95,38058.5 3015.95,38078.5 3125.32,38078.5 3125.32,38058.5
  region: 3015.95,38008.5 3015.95,38028.5 3125.32,38028.5 3125.32,38008.5
  region: 3015.95,37958.5 3015.95,37978.5 3125.32,37978.5 3125.32,37958.5
  region: 3015.95,37908.5 3015.95,37928.5 3125.32,37928.5 3125.32,37908.5
  region: 3015.95,37858.5 3015.95,37878.5 3125.32,37878.5 3125.32,37858.5
  region: 3015.95,37808.5 3015.95,37828.5 3125.32,37828.5 3125.32,37808.5
  region: 3015.95,37758.5 3015.95,37778.5 3125.32,37778.5 3125.32,37758.5
  region: 3015.95,37708.5 3015.95,37728.5 3125.32,37728.5 3125.32,37708.5
  region: 3015.95,37658.5 3015.95,37678.5 3125.32,37678.5 3125.32,37658.5
  region: 3445.32,38608.5 3445.32,38628.5 3554.69,38628.5 3554.69,38608.5
  region: 3445.32,38558.5 3445.32,38578.5 3554.69,38578.5 3554.69,38558.5
  region: 3445.32,38508.5 3445.32,38528.5 3554.69,38528.5 3554.69,38508.5
  region: 3445.32,38458.5 3445.32,38478.5 3554.69,38478.5 3554.69,38458.5
  region: 3445.32,38408.5 3445.32,38428.5 3554.69,38428.5 3554.69,38408.5
  region: 3445.32,38358.5 3445.32,38378.5 3554.69,38378.5 3554.69,38358.5
  region: 3445.32,38258.5 3445.32,38278.5 3554.69,38278.5 3554.69,38258.5
  region: 3445.32,38208.5 3445.32,38228.5 3554.69,38228.5 3554.69,38208.5
  region: 3445.32,38158.5 3445.32,38178.5 3554.69,38178.5 3554.69,38158.5
  region: 3445.32,38108.5 3445.32,38128.5 3554.69,38128.5 3554.69,38108.5
  region: 3445.32,38058.5 3445.32,38078.5 3554.69,38078.5 3554.69,38058.5
  region: 3445.32,38008.5 3445.32,38028.5 3554.69,38028.5 3554.69,38008.5
  region: 3445.32,37958.5 3445.32,37978.5 3554.69,37978.5 3554.69,37958.5
  region: 3445.32,37908.5 3445.32,37928.5 3554.69,37928.5 3554.69,37908.5
  region: 3445.32,37858.5 3445.32,37878.5 3554.69,37878.5 3554.69,37858.5
  region: 3445.32,37808.5 3445.32,37828.5 3554.69,37828.5 3554.69,37808.5
  region: 3445.32,37758.5 3445.32,37778.5 3554.69,37778.5 3554.69,37758.5
  region: 3445.32,37708.5 3445.32,37728.5 3554.69,37728.5 3554.69,37708.5
  region: 3445.32,37658.5 3445.32,37678.5 3554.69,37678.5 3554.69,37658.5
  region: 3710.95,37658.5 3710.95,37678.5 3820.32,37678.5 3820.32,37658.5
  region: 3710.95,37708.5 3710.95,37728.5 3820.32,37728.5 3820.32,37708.5
  region: 3710.95,37758.5 3710.95,37778.5 3820.32,37778.5 3820.32,37758.5
  region: 3710.95,37808.5 3710.95,37828.5 3820.32,37828.5 3820.32,37808.5
  region: 3710.95,37858.5 3710.95,37878.5 3820.32,37878.5 3820.32,37858.5
  region: 3710.95,37908.5 3710.95,37928.5 3820.32,37928.5 3820.32,37908.5
  region: 3710.95,37958.5 3710.95,37978.5 3820.32,37978.5 3820.32,37958.5
  region: 3710.95,38008.5 3710.95,38028.5 3820.32,38028.5 3820.32,38008.5
  region: 3710.95,38058.5 3710.95,38078.5 3820.32,38078.5 3820.32,38058.5
  region: 3710.95,38108.5 3710.95,38128.5 3820.32,38128.5 3820.32,38108.5
  region: 3710.95,38158.5 3710.95,38178.5 3820.32,38178.5 3820.32,38158.5
  region: 3710.95,38208.5 3710.95,38228.5 3820.32,38228.5 3820.32,38208.5
  region: 3710.95,38258.5 3710.95,38278.5 3820.32,38278.5 3820.32,38258.5
  region: 3710.95,38308.5 3710.95,38328.5 3820.32,38328.5 3820.32,38308.5
  region: 3710.95,38358.5 3710.95,38378.5 3820.32,38378.5 3820.32,38358.5
  region: 3710.95,38408.5 3710.95,38428.5 3820.32,38428.5 3820.32,38408.5
  region: 3710.95,38458.5 3710.95,38478.5 3820.32,38478.5 3820.32,38458.5
  region: 3710.95,38508.5 3710.95,38528.5 3820.32,38528.5 3820.32,38508.5
  region: 3710.95,38558.5 3710.95,38578.5 3820.32,38578.5 3820.32,38558.5
  region: 3710.95,38608.5 3710.95,38628.5 3820.32,38628.5 3820.32,38608.5
  region: 4140.32,38608.5 4140.32,38628.5 4249.69,38628.5 4249.69,38608.5
  region: 4140.32,38558.5 4140.32,38578.5 4249.69,38578.5 4249.69,38558.5
  region: 4140.32,38508.5 4140.32,38528.5 4249.69,38528.5 4249.69,38508.5
  region: 4140.32,38458.5 4140.32,38478.5 4249.69,38478.5 4249.69,38458.5
  region: 4140.32,38408.5 4140.32,38428.5 4249.69,38428.5 4249.69,38408.5
  region: 4140.32,38358.5 4140.32,38378.5 4249.69,38378.5 4249.69,38358.5
  region: 4140.32,38258.5 4140.32,38278.5 4249.69,38278.5 4249.69,38258.5
  region: 4140.32,38208.5 4140.32,38228.5 4249.69,38228.5 4249.69,38208.5
  region: 4140.32,38158.5 4140.32,38178.5 4249.69,38178.5 4249.69,38158.5
  region: 4140.32,38108.5 4140.32,38128.5 4249.69,38128.5 4249.69,38108.5
  region: 4140.32,38058.5 4140.32,38078.5 4249.69,38078.5 4249.69,38058.5
  region: 4140.32,38008.5 4140.32,38028.5 4249.69,38028.5 4249.69,38008.5
  region: 4140.32,37958.5 4140.32,37978.5 4249.69,37978.5 4249.69,37958.5
  region: 4140.32,37908.5 4140.32,37928.5 4249.69,37928.5 4249.69,37908.5
  region: 4140.32,37858.5 4140.32,37878.5 4249.69,37878.5 4249.69,37858.5
  region: 4140.32,37808.5 4140.32,37828.5 4249.69,37828.5 4249.69,37808.5
  region: 4140.32,37758.5 4140.32,37778.5 4249.69,37778.5 4249.69,37758.5
  region: 4140.32,37708.5 4140.32,37728.5 4249.69,37728.5 4249.69,37708.5
  region: 4140.32,37658.5 4140.32,37678.5 4249.69,37678.5 4249.69,37658.5
Bottom Layer:
  region: 2054.68,38308.5 2054.68,38328.5 2164.05,38328.5 2164.05,38308.5
  region: 2750.32,38308.5 2750.32,38328.5 2859.69,38328.5 2859.69,38308.5
  region: 3445.32,38308.5 3445.32,38328.5 3554.69,38328.5 3554.69,38308.5
  region: 4140.32,38308.5 4140.32,38328.5 4249.69,38328.5 4249.69,38308.5
  region: 1625.31,38608.5 1625.31,38628.5 1734.68,38628.5 1734.68,38608.5
  region: 1625.31,38558.5 1625.31,38578.5 1734.68,38578.5 1734.68,38558.5
  region: 1625.31,38508.5 1625.31,38528.5 1734.68,38528.5 1734.68,38508.5
  region: 1625.31,38458.5 1625.31,38478.5 1734.68,38478.5 1734.68,38458.5
  region: 1625.31,38408.5 1625.31,38428.5 1734.68,38428.5 1734.68,38408.5
  region: 1625.31,38358.5 1625.31,38378.5 1734.68,38378.5 1734.68,38358.5
  region: 1625.31,38308.5 1625.31,38328.5 1734.68,38328.5 1734.68,38308.5
  region: 1625.31,38258.5 1625.31,38278.5 1734.68,38278.5 1734.68,38258.5
  region: 1625.31,38208.5 1625.31,38228.5 1734.68,38228.5 1734.68,38208.5
  region: 1625.31,38158.5 1625.31,38178.5 1734.68,38178.5 1734.68,38158.5
  region: 1625.31,38108.5 1625.31,38128.5 1734.68,38128.5 1734.68,38108.5
  region: 1625.31,38058.5 1625.31,38078.5 1734.68,38078.5 1734.68,38058.5
  region: 1625.31,38008.5 1625.31,38028.5 1734.68,38028.5 1734.68,38008.5
  region: 1625.31,37958.5 1625.31,37978.5 1734.68,37978.5 1734.68,37958.5
  region: 1625.31,37908.5 1625.31,37928.5 1734.68,37928.5 1734.68,37908.5
  region: 1625.31,37858.5 1625.31,37878.5 1734.68,37878.5 1734.68,37858.5
  region: 1625.31,37808.5 1625.31,37828.5 1734.68,37828.5 1734.68,37808.5
  region: 1625.31,37758.5 1625.31,37778.5 1734.68,37778.5 1734.68,37758.5
  region: 1625.31,37708.5 1625.31,37728.5 1734.68,37728.5 1734.68,37708.5
  region: 1625.31,37658.5 1625.31,37678.5 1734.68,37678.5 1734.68,37658.5
  region: 2054.68,38608.5 2054.68,38628.5 2164.05,38628.5 2164.05,38608.5
  region: 2054.68,38558.5 2054.68,38578.5 2164.05,38578.5 2164.05,38558.5
  region: 2054.68,38508.5 2054.68,38528.5 2164.05,38528.5 2164.05,38508.5
  region: 2054.68,38458.5 2054.68,38478.5 2164.05,38478.5 2164.05,38458.5
  region: 2054.68,38408.5 2054.68,38428.5 2164.05,38428.5 2164.05,38408.5
  region: 2054.68,38358.5 2054.68,38378.5 2164.05,38378.5 2164.05,38358.5
  region: 2054.68,38258.5 2054.68,38278.5 2164.05,38278.5 2164.05,38258.5
  region: 2054.68,38208.5 2054.68,38228.5 2164.05,38228.5 2164.05,38208.5
  region: 2054.68,38158.5 2054.68,38178.5 2164.05,38178.5 2164.05,38158.5
  region: 2054.68,38108.5 2054.68,38128.5 2164.05,38128.5 2164.05,38108.5
  region: 2054.68,38058.5 2054.68,38078.5 2164.05,38078.5 2164.05,38058.5
  region: 2054.68,38008.5 2054.68,38028.5 2164.05,38028.5 2164.05,38008.5
  region: 2054.68,37958.5 2054.68,37978.5 2164.05,37978.5 2164.05,37958.5
  region: 2054.68,37908.5 2054.68,37928.5 2164.05,37928.5 2164.05,37908.5
  region: 2054.68,37858.5 2054.68,37878.5 2164.05,37878.5 2164.05,37858.5
  region: 2054.68,37808.5 2054.68,37828.5 2164.05,37828.5 2164.05,37808.5
  region: 2054.68,37758.5 2054.68,37778.5 2164.05,37778.5 2164.05,37758.5
  region: 2054.68,37708.5 2054.68,37728.5 2164.05,37728.5 2164.05,37708.5
  region: 2054.68,37658.5 2054.68,37678.5 2164.05,37678.5 2164.05,37658.5
  region: 2320.95,38558.5 2320.95,38578.5 2430.32,38578.5 2430.32,38558.5
  region: 2320.95,38508.5 2320.95,38528.5 2430.32,38528.5 2430.32,38508.5
  region: 2320.95,38458.5 2320.95,38478.5 2430.32,38478.5 2430.32,38458.5
  region: 2750.32,37658.5 2750.32,37678.5 2859.69,37678.5 2859.69,37658.5
  region: 2750.32,37708.5 2750.32,37728.5 2859.69,37728.5 2859.69,37708.5
  region: 2750.32,37758.5 2750.32,37778.5 2859.69,37778.5 2859.69,37758.5
  region: 2750.32,37808.5 2750.32,37828.5 2859.69,37828.5 2859.69,37808.5
  region: 2750.32,37858.5 2750.32,37878.5 2859.69,37878.5 2859.69,37858.5
  region: 2750.32,37908.5 2750.32,37928.5 2859.69,37928.5 2859.69,37908.5
  region: 2750.32,37958.5 2750.32,37978.5 2859.69,37978.5 2859.69,37958.5
  region: 2750.32,38008.5 2750.32,38028.5 2859.69,38028.5 2859.69,38008.5
  region: 2750.32,38058.5 2750.32,38078.5 2859.69,38078.5 2859.69,38058.5
  region: 2750.32,38108.5 2750.32,38128.5 2859.69,38128.5 2859.69,38108.5
  region: 2750.32,38158.5 2750.32,38178.5 2859.69,38178.5 2859.69,38158.5
  region: 2750.32,38208.5 2750.32,38228.5 2859.69,38228.5 2859.69,38208.5
  region: 2750.32,38258.5 2750.32,38278.5 2859.69,38278.5 2859.69,38258.5
  region: 2750.32,38358.5 2750.32,38378.5 2859.69,38378.5 2859.69,38358.5
  region: 2750.32,38408.5 2750.32,38428.5 2859.69,38428.5 2859.69,38408.5
  region: 2750.32,38458.5 2750.32,38478.5 2859.69,38478.5 2859.69,38458.5
  region: 2750.32,38508.5 2750.32,38528.5 2859.69,38528.5 2859.69,38508.5
  region: 2750.32,38558.5 2750.32,38578.5 2859.69,38578.5 2859.69,38558.5
  region: 2750.32,38608.5 2750.32,38628.5 2859.69,38628.5 2859.69,38608.5
  region: 2320.95,38608.5 2320.95,38628.5 2430.32,38628.5 2430.32,38608.5
  region: 2320.95,38408.5 2320.95,38428.5 2430.32,38428.5 2430.32,38408.5
  region: 2320.95,38358.5 2320.95,38378.5 2430.32,38378.5 2430.32,38358.5
  region: 2320.95,38308.5 2320.95,38328.5 2430.32,38328.5 2430.32,38308.5
  region: 2320.95,38258.5 2320.95,38278.5 2430.32,38278.5 2430.32,38258.5
  region: 2320.95,38208.5 2320.95,38228.5 2430.32,38228.5 2430.32,38208.5
  region: 2320.95,38158.5 2320.95,38178.5 2430.32,38178.5 2430.32,38158.5
  region: 2320.95,38108.5 2320.95,38128.5 2430.32,38128.5 2430.32,38108.5
  region: 2320.95,38058.5 2320.95,38078.5 2430.32,38078.5 2430.32,38058.5
  region: 2320.95,38008.5 2320.95,38028.5 2430.32,38028.5 2430.32,38008.5
  region: 2320.95,37958.5 2320.95,37978.5 2430.32,37978.5 2430.32,37958.5
  region: 2320.95,37908.5 2320.95,37928.5 2430.32,37928.5 2430.32,37908.5
  region: 2320.95,37858.5 2320.95,37878.5 2430.32,37878.5 2430.32,37858.5
  region: 2320.95,37808.5 2320.95,37828.5 2430.32,37828.5 2430.32,37808.5
  region: 2320.95,37758.5 2320.95,37778.5 2430.32,37778.5 2430.32,37758.5
  region: 2320.95,37708.5 2320.95,37728.5 2430.32,37728.5 2430.32,37708.5
  region: 2320.95,37658.5 2320.95,37678.5 2430.32,37678.5 2430.32,37658.5
  region: 3015.95,38608.5 3015.95,38628.5 3125.32,38628.5 3125.32,38608.5
  region: 3015.95,38558.5 3015.95,38578.5 3125.32,38578.5 3125.32,38558.5
  region: 3015.95,38508.5 3015.95,38528.5 3125.32,38528.5 3125.32,38508.5
  region: 3015.95,38458.5 3015.95,38478.5 3125.32,38478.5 3125.32,38458.5
  region: 3015.95,38408.5 3015.95,38428.5 3125.32,38428.5 3125.32,38408.5
  region: 3015.95,38358.5 3015.95,38378.5 3125.32,38378.5 3125.32,38358.5
  region: 3015.95,38308.5 3015.95,38328.5 3125.32,38328.5 3125.32,38308.5
  region: 3015.95,38258.5 3015.95,38278.5 3125.32,38278.5 3125.32,38258.5
  region: 3015.95,38208.5 3015.95,38228.5 3125.32,38228.5 3125.32,38208.5
  region: 3015.95,38158.5 3015.95,38178.5 3125.32,38178.5 3125.32,38158.5
  region: 3015.95,38108.5 3015.95,38128.5 3125.32,38128.5 3125.32,38108.5
  region: 3015.95,38058.5 3015.95,38078.5 3125.32,38078.5 3125.32,38058.5
  region: 3015.95,38008.5 3015.95,38028.5 3125.32,38028.5 3125.32,38008.5
  region: 3015.95,37958.5 3015.95,37978.5 3125.32,37978.5 3125.32,37958.5
  region: 3015.95,37908.5 3015.95,37928.5 3125.32,37928.5 3125.32,37908.5
  region: 3015.95,37858.5 3015.95,37878.5 3125.32,37878.5 3125.32,37858.5
  region: 3015.95,37808.5 3015.95,37828.5 3125.32,37828.5 3125.32,37808.5
  region: 3015.95,37758.5 3015.95,37778.5 3125.32,37778.5 3125.32,37758.5
  region: 3015.95,37708.5 3015.95,37728.5 3125.32,37728.5 3125.32,37708.5
  region: 3015.95,37658.5 3015.95,37678.5 3125.32,37678.5 3125.32,37658.5
  region: 3445.32,38358.5 3445.32,38378.5 3554.69,38378.5 3554.69,38358.5
  region: 3445.32,38408.5 3445.32,38428.5 3554.69,38428.5 3554.69,38408.5
  region: 3445.32,38458.5 3445.32,38478.5 3554.69,38478.5 3554.69,38458.5
  region: 3445.32,38508.5 3445.32,38528.5 3554.69,38528.5 3554.69,38508.5
  region: 3445.32,38558.5 3445.32,38578.5 3554.69,38578.5 3554.69,38558.5
  region: 3445.32,38608.5 3445.32,38628.5 3554.69,38628.5 3554.69,38608.5
  region: 3445.32,38258.5 3445.32,38278.5 3554.69,38278.5 3554.69,38258.5
  region: 3445.32,38208.5 3445.32,38228.5 3554.69,38228.5 3554.69,38208.5
  region: 3445.32,38158.5 3445.32,38178.5 3554.69,38178.5 3554.69,38158.5
  region: 3445.32,38108.5 3445.32,38128.5 3554.69,38128.5 3554.69,38108.5
  region: 3445.32,38058.5 3445.32,38078.5 3554.69,38078.5 3554.69,38058.5
  region: 3445.32,38008.5 3445.32,38028.5 3554.69,38028.5 3554.69,38008.5
  region: 3445.32,37958.5 3445.32,37978.5 3554.69,37978.5 3554.69,37958.5
  region: 3445.32,37908.5 3445.32,37928.5 3554.69,37928.5 3554.69,37908.5
  region: 3445.32,37858.5 3445.32,37878.5 3554.69,37878.5 3554.69,37858.5
  region: 3445.32,37808.5 3445.32,37828.5 3554.69,37828.5 3554.69,37808.5
  region: 3445.32,37758.5 3445.32,37778.5 3554.69,37778.5 3554.69,37758.5
  region: 3445.32,37708.5 3445.32,37728.5 3554.69,37728.5 3554.69,37708.5
  region: 3445.32,37658.5 3445.32,37678.5 3554.69,37678.5 3554.69,37658.5
  region: 3710.95,38608.5 3710.95,38628.5 3820.32,38628.5 3820.32,38608.5
  region: 3710.95,38558.5 3710.95,38578.5 3820.32,38578.5 3820.32,38558.5
  region: 3710.95,38508.5 3710.95,38528.5 3820.32,38528.5 3820.32,38508.5
  region: 3710.95,38458.5 3710.95,38478.5 3820.32,38478.5 3820.32,38458.5
  region: 3710.95,38408.5 3710.95,38428.5 3820.32,38428.5 3820.32,38408.5
  region: 3710.95,38358.5 3710.95,38378.5 3820.32,38378.5 3820.32,38358.5
  region: 3710.95,38308.5 3710.95,38328.5 3820.32,38328.5 3820.32,38308.5
  region: 3710.95,38258.5 3710.95,38278.5 3820.32,38278.5 3820.32,38258.5
  region: 3710.95,38208.5 3710.95,38228.5 3820.32,38228.5 3820.32,38208.5
  region: 3710.95,38158.5 3710.95,38178.5 3820.32,38178.5 3820.32,38158.5
  region: 3710.95,38108.5 3710.95,38128.5 3820.32,38128.5 3820.32,38108.5
  region: 3710.95,38058.5 3710.95,38078.5 3820.32,38078.5 3820.32,38058.5
  region: 3710.95,38008.5 3710.95,38028.5 3820.32,38028.5 3820.32,38008.5
  region: 3710.95,37958.5 3710.95,37978.5 3820.32,37978.5 3820.32,37958.5
  region: 3710.95,37908.5 3710.95,37928.5 3820.32,37928.5 3820.32,37908.5
  region: 3710.95,37858.5 3710.95,37878.5 3820.32,37878.5 3820.32,37858.5
  region: 3710.95,37808.5 3710.95,37828.5 3820.32,37828.5 3820.32,37808.5
  region: 3710.95,37758.5 3710.95,37778.5 3820.32,37778.5 3820.32,37758.5
  region: 3710.95,37708.5 3710.95,37728.5 3820.32,37728.5 3820.32,37708.5
  region: 3710.95,37658.5 3710.95,37678.5 3820.32,37678.5 3820.32,37658.5
  region: 4140.32,38358.5 4140.32,38378.5 4249.69,38378.5 4249.69,38358.5
  region: 4140.32,38408.5 4140.32,38428.5 4249.69,38428.5 4249.69,38408.5
  region: 4140.32,38458.5 4140.32,38478.5 4249.69,38478.5 4249.69,38458.5
  region: 4140.32,38508.5 4140.32,38528.5 4249.69,38528.5 4249.69,38508.5
  region: 4140.32,38558.5 4140.32,38578.5 4249.69,38578.5 4249.69,38558.5
  region: 4140.32,38608.5 4140.32,38628.5 4249.69,38628.5 4249.69,38608.5
  region: 4140.32,38258.5 4140.32,38278.5 4249.69,38278.5 4249.69,38258.5
  region: 4140.32,38208.5 4140.32,38228.5 4249.69,38228.5 4249.69,38208.5
  region: 4140.32,38158.5 4140.32,38178.5 4249.69,38178.5 4249.69,38158.5
  region: 4140.32,38108.5 4140.32,38128.5 4249.69,38128.5 4249.69,38108.5
  region: 4140.32,38058.5 4140.32,38078.5 4249.69,38078.5 4249.69,38058.5
  region: 4140.32,38008.5 4140.32,38028.5 4249.69,38028.5 4249.69,38008.5
  region: 4140.32,37958.5 4140.32,37978.5 4249.69,37978.5 4249.69,37958.5
  region: 4140.32,37908.5 4140.32,37928.5 4249.69,37928.5 4249.69,37908.5
  region: 4140.32,37858.5 4140.32,37878.5 4249.69,37878.5 4249.69,37858.5
  region: 4140.32,37808.5 4140.32,37828.5 4249.69,37828.5 4249.69,37808.5
  region: 4140.32,37758.5 4140.32,37778.5 4249.69,37778.5 4249.69,37758.5
  region: 4140.32,37708.5 4140.32,37728.5 4249.69,37728.5 4249.69,37708.5
  region: 4140.32,37658.5 4140.32,37678.5 4249.69,37678.5 4249.69,37658.5

## Silkscreen, mask and mechanical layers (free items; w line width, h text height)
Top Overlay:
  lines w5.91: 1564.68,37623.5 2219.68,37623.5 ; 1564.68,38663.5 2219.68,38663.5 ; 1739.68,37623.5 1739.68,37638.5 1739.68,38648.5 1739.68,38663.5 ; 2049.68,37623.5 2049.68,37638.5 2049.68,38648.5 2049.68,38663.5 ; 2260.32,37623.5 2915.32,37623.5 ; 2260.32,38663.5 2915.32,38663.5 ; 2435.32,37623.5 2435.32,37638.5 2435.32,38648.5 2435.32,38663.5 ; 2745.32,37623.5 2745.32,37638.5 2745.32,38648.5 2745.32,38663.5 ; 2955.32,37623.5 3610.32,37623.5 ; 2955.32,38663.5 3610.32,38663.5 ; 3130.32,37623.5 3130.32,37638.5 3130.32,38648.5 3130.32,38663.5 ; 3440.32,37623.5 3440.32,37638.5 3440.32,38648.5 3440.32,38663.5 ; 3650.32,37623.5 4305.32,37623.5 ; 3650.32,38663.5 4305.32,38663.5 ; 3825.32,37623.5 3825.32,37638.5 3825.32,38648.5 3825.32,38663.5 ; 4135.32,37623.5 4135.32,37638.5 4135.32,38648.5 4135.32,38663.5 ; 1564.68,37483.5 2139.68,37483.5 2219.68,37563.5 2219.68,38803.5 1564.68,38803.5 1564.68,37483.5 ; 2084.36,37588.5 2104.36,37608.5 2124.36,37588.5 2104.36,37568.5 2084.36,37588.5 ; 2260.32,37483.5 2835.32,37483.5 2915.32,37563.5 2915.32,38803.5 2260.32,38803.5 2260.32,37483.5 ; 2780,37588.5 2800,37608.5 2820,37588.5 2800,37568.5 2780,37588.5 ; 2955.32,37483.5 3530.32,37483.5 3610.32,37563.5 3610.32,38803.5 2955.32,38803.5 2955.32,37483.5 ; 3475,37588.5 3495,37608.5 3515,37588.5 3495,37568.5 3475,37588.5 ; 3650.32,37483.5 4225.32,37483.5 4305.32,37563.5 4305.32,38803.5 3650.32,38803.5 3650.32,37483.5 ; 4170,37588.5 4190,37608.5 4210,37588.5 4190,37568.5 4170,37588.5
  lines w10: 2195,37358.5 2385,37358.5 2385,37438.5 2195,37438.5 2195,37358.5 ; 2490,37358.5 2915,37358.5 2915,37438.5 2490,37438.5 2490,37358.5 ; 2955,37358.5 3380,37358.5 3380,37438.5 2955,37438.5 2955,37358.5
  text "TMU U7 / FBI U15" at 2965,38758.5 h47.24
  text "TMU U8 / FBI U16" at 3665,38759.3 h47.24
  text "TMU U5 / FBI U13" at 1585,38755.4 h47.24
  text "TMU U6 / FBI U14" at 2275,38755.3 h47.24
  text "UP" at 4155,38653.5 h80
  text "TMU 130/FBI 180" at 1815,37408.5 h49.21 r1
  text "R1 47Ω" at 2620,37378.5 h59.05
  text "R2 47Ω" at 3085,37378.5 h59.05
  text "Maxi Gamer 3D / TMU + FBI MOD" at 3450,37364.25 h48.5
  text "TMU 130/FBI 199" at 1825,37308.5 h49.21 r1
  text "JP1" at 2250,37303.5 h59.05 r1
Bottom Overlay:
  lines w5.91: 1564.68,37623.5 2219.68,37623.5 ; 1564.68,38663.5 2219.68,38663.5 ; 1739.68,37623.5 1739.68,37638.5 1739.68,38648.5 1739.68,38663.5 ; 2049.68,37623.5 2049.68,37638.5 2049.68,38648.5 2049.68,38663.5 ; 2260.32,37623.5 2915.32,37623.5 ; 2260.32,38663.5 2915.32,38663.5 ; 2435.32,37623.5 2435.32,37638.5 2435.32,38648.5 2435.32,38663.5 ; 2745.32,37623.5 2745.32,37638.5 2745.32,38648.5 2745.32,38663.5 ; 2955.32,37623.5 3610.32,37623.5 ; 2955.32,38663.5 3610.32,38663.5 ; 3130.32,37623.5 3130.32,37638.5 3130.32,38648.5 3130.32,38663.5 ; 3440.32,37623.5 3440.32,37638.5 3440.32,38648.5 3440.32,38663.5 ; 3650.32,37623.5 4305.32,37623.5 ; 3650.32,38663.5 4305.32,38663.5 ; 3825.32,37623.5 3825.32,37638.5 3825.32,38648.5 3825.32,38663.5 ; 4135.32,37623.5 4135.32,37638.5 4135.32,38648.5 4135.32,38663.5 ; 1564.7,37563.2 1645,37483.5 2139.7,37483.5 2220,37483.5 2219.7,37563.5 2219.7,38803.5 1564.7,38803.5 1564.7,37563.2 ; 2085,37588.5 2105,37608.5 2125,37588.5 2105,37568.5 2085,37588.5 ; 2260.3,37561.2 2340,37483.5 2835.3,37483.5 2915,37483.5 2915.3,37563.5 2915.3,38803.5 2260.3,38803.5 2260.3,37561.2 ; 2780.64,37588.5 2800.64,37608.5 2820.64,37588.5 2800.64,37568.5 2780.64,37588.5 ; 2955.3,37564.8 3035,37483.5 3530.3,37483.5 3610,37483.5 3610.3,37563.5 3610.3,38803.5 2955.3,38803.5 2955.3,37564.8 ; 3475.64,37588.5 3495.64,37608.5 3515.64,37588.5 3495.64,37568.5 3475.64,37588.5 ; 3650.3,37560.5 3730,37483.5 4225.3,37483.5 4305,37483.5 4305.3,37563.5 4305.3,38803.5 3650.3,38803.5 3650.3,37560.5 ; 4170.64,37588.5 4190.64,37608.5 4210.64,37588.5 4190.64,37568.5 4170.64,37588.5
  lines w10: 3610,37298.5 3960,37298.5 ; 3610,37298.5 3610,37433.5 3960,37433.5 ; 3610,37298.5 3890,37298.5 ; 3610,37298.5 3610,37363.5 3890,37363.5 3890,37298.5 ; 3890,37298.5 3960,37298.5 ; 3890,37298.5 3890,37433.5 3960,37433.5 ; 3960,37298.5 3960,37433.5 ; 3960,37298.5 3960,37433.5 ; 3960,37298.5 3960,37433.5 ; 3960,37298.5 3740,37298.5 3740,37433.5 3960,37433.5
  text "TMU U3 / FBI U11" at 3590,38756.6 h47.24
  text "TMU U4 / FBI U12" at 4290,38757.4 h47.24
  text "TMU U1 / FBI U9" at 2210,38753.5 h47.24
  text "TMU U2 / FBI U10" at 2900,38753.4 h47.24
  text "DOWN" at 1900,38653.5 h80
  text "FBI 124" at 4115,38308.5 h39.37
  text "FBI 125" at 2030,38303.5 h39.37
  text "FBI 125" at 2730,38303.5 h39.37
  text "FBI 124" at 3425,38303.5 h39.37
  text "Open" at 3880,37383.5 h59.05 r6
  text "FBI" at 3710,37373.5 h59.05
  text "JP1" at 3900,37328.5 h59.05 r269
  text "Close" at 3880,37313.5 h59.05 r2
  text "TMU" at 3730,37308.5 h59.05
  text "REV 1.1" at 3580,37288.82 h39.37
Top Paste:
  drawing of 161 lines, arcs and shapes, not listed
Bottom Paste:
  drawing of 160 lines, arcs and shapes, not listed
Top Solder:
  drawing of 161 lines, arcs and shapes, not listed
Bottom Solder:
  drawing of 160 lines, arcs and shapes, not listed
Document:
  lines w0.1: 24211.24,20174.24 24211.26,20174.26